# Altium PCB 400861.PcbDoc (part 3 of 7)
Units mm, origin at the board's own origin, x right, y up, seen from the top; angles counter-clockwise.
Board outline 145 x 63.5 mm, 8 copper layers (Top Side, Mid-Layer 1, Mid-Layer 2, Mid-Layer 3, Mid-Layer 4, Mid-Layer 5, Mid-Layer 6, Bottom Side), stack 1.529 mm thick; 287 components, 241 nets, 1164 pads, 3527 vias.
Unrouted connection lines stored in the file: 1.
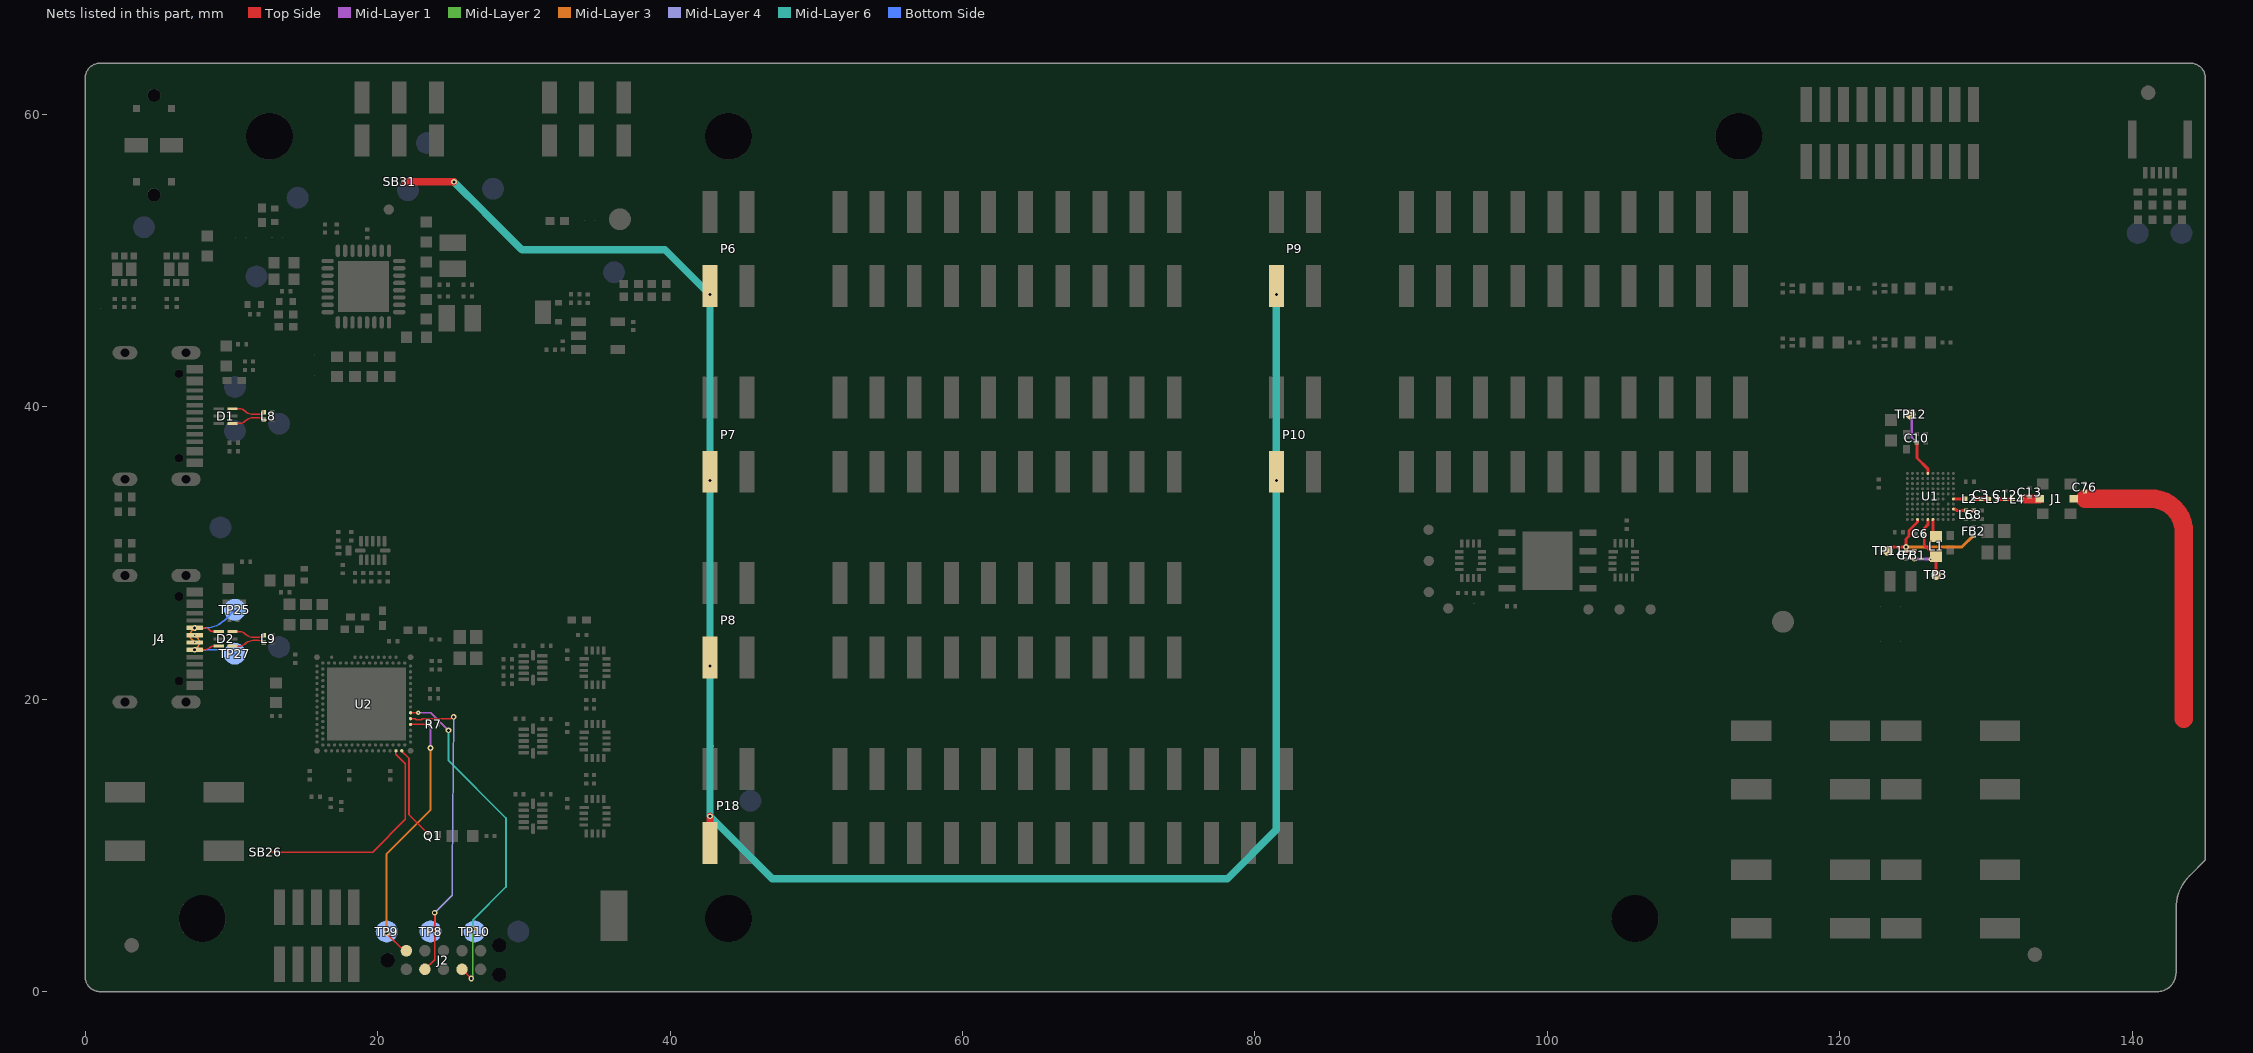
[diagram p8: the nets of this part, all layers, seen from the top]

## Part data (continued)
Q1 Q4 Q5 Q6 Q7 Q9: "N-Channel MOSFET, 20V, 1A, 470mOhm, 400mW, -55°C ~ 150°C", Manufacturer="Rohm Semiconductor", Part number IPS=00000009976, Part number NEMS=101300132, Part number Norautron=26320026, Supplier Part Number 1=RV2C010UNT2LCT-ND, Artikkelnr Noca=35010020, Author=rsk, Component Class=Semiconductors, Component Status=Active, ComponentLink1Description=Datasheet, ComponentLink1URL=N.A., ComponentLink2Description="Supplier link", ComponentLink2URL=N.A., Footprint Doc=DFN-3, HelpURL=http://rohmfs.rohm.com/en/products/databook/datasheet/discrete/transistor/mosfet/rv2c010unt2l-e.pdf, LatestRevisionDate=2024-09-18, Manufacturer Part Number=RV2C010UNT2L, Note=N.A., Pad Count=3, Part Number=RV2C010UNT2L, PartId=101300132, Published=2016-08-09, Supplier 1=Digi-Key, Supplier 2=Mouser, Supplier Part Number 2=755-RV2C010UNT2L
Q2 Q3: "Dual P-Channel MOFET, 3.8A, 90mOhm max, 1.4W", Manufacturer="Micro Commercial Components", Part number IPS=N.A., Part number NEMS=101300199, Supplier Part Number 1=MCM2301-TPMSCT-ND, Artikkelnr Noca=N.A., Author=rubr, Component Class=Semiconductors, Component Status=Active, ComponentLink1Description=Datasheet, ComponentLink1URL=https://www.mccsemi.com/pdf/Products/MCM2301(DFN2020-6L).pdf, ComponentLink2Description="Supplier link", ComponentLink2URL=https://www.digikey.com/en/products/detail/micro-commercial-co/MCM2301-TP/9655971, Footprint Doc=VDFN-6, HelpURL=https://www.mccsemi.com/product-detail/MCM2301, LatestRevisionDate=2022-12-27, Manufacturer Part Number=MCM2301-TP, Note=N.A., Pad Count=6, Part Number=MCM2301-TP, Part number Norautron=N.A., PartId=101300199, Published=2022-12-27, Supplier 1=Digi-Key, Supplier 2=Mouser, Supplier Part Number 2=833-MCM2301-TP
Q8: library part PBSS4330PA,115, "30V, 3A, 2.1W, G=270, NPN Transistor", Manufacturer=Nexperia, Part number IPS=N.A., Part number NEMS=101300184, Supplier Part Number 1=1727-5112-1-ND‎, Artikkelnr Noca=N.A., Author=rubr, Component Class=Semiconductors, Component Status=Active, ComponentLink1Description=Datasheet, ComponentLink1URL=https://assets.nexperia.com/documents/data-sheet/PBSS4330PA.pdf, ComponentLink2Description="Supplier link", ComponentLink2URL=https://www.digikey.com/en/products/detail/nexperia-usa-inc/PBSS4330PA-115/2296330, Footprint Doc="HUSON-3 (2x2)", HelpURL=https://www.nexperia.com/products/bipolar-transistors/general-purpose-and-low-vcesat-bipolar-transistors/single-bipolar-transistors/single-bipolar-transistors-100-v/PBSS4330PA.html, LatestRevisionDate=2021-06-03, Manufacturer Part Number=PBSS4330PA,115, Note=N.A., Pad Count=3, Part Number=PBSS4330PA,115, Part number Norautron=N.A., PartId=101300184, Published=2021-06-03, Supplier 1=Digi-Key, Supplier 2=N.A., Supplier Part Number 2=N.A.
R1 R11: library part R0603-2R2, "RES 2.2 OHM 1% 1/10W 0603", Manufacturer=N.A., Part number NEMS=100100736, Artikkelnr Noca=N.A., Author=getr, Component Class=Resistors, Component Status=Active, ComponentLink1Description=Datasheet, ComponentLink1URL=N.A., ComponentLink2Description="Supplier link", ComponentLink2URL=N.A., Footprint Doc=0603, HelpURL=N.A., LatestRevisionDate=2025-05-14, Manufacturer Part Number=N.A., Note="Chip Res 1%", Pad Count=2, Part Number=R0603-2R2, Part number IPS=N.A., Part number Norautron=N.A., PartId=100100736, Published=2025-05-14, Supplier 1=N.A., Supplier 2=N.A., Supplier Part Number 1=N.A., Supplier Part Number 2=N.A.
R2: library part R0201-200, "Resistor, ±1%, 0.05W", Manufacturer=N.A., Part number NEMS=100100611, Artikkelnr Noca=N.A., Author=getr, Component Class=Resistors, Component Status=Active, ComponentLink1Description=Datasheet, ComponentLink1URL=N.A., ComponentLink2Description="Supplier link", ComponentLink2URL=N.A., Footprint Doc=0201, HelpURL=N.A., LatestRevisionDate=2021-04-08, Manufacturer Part Number=N.A., Note="Chip Res 1%", Pad Count=2, Part Number=R0201-200, Part number IPS=N.A., Part number Norautron=N.A., PartId=100100611, Published=2021-04-08, Supplier 1=N.A., Supplier 2=N.A., Supplier Part Number 1=N.A., Supplier Part Number 2=N.A.
R3 R4: library part R0402-N.C., "Not mounted", Manufacturer=N.A., Part number NEMS=100100281, Artikkelnr Noca=N.A., Assembly="Not mounted", Author=rsk, Component Class=Resistors, Component Status=Active, ComponentLink1Description=Datasheet, ComponentLink1URL=N.A., ComponentLink2Description="Supplier link", ComponentLink2URL=N.A., Footprint Doc=0402, HelpURL=N.A., LatestRevisionDate=2009-05-08, Manufacturer Part Number=N.A., Note="Chip Res", Pad Count=2, Part Number=R0402-N.C., Part number IPS=N.A., Part number Norautron=N.A., PartId=100100281, Published=2009-05-08, Supplier 1=N.A., Supplier 2=N.A., Supplier Part Number 1=N.A., Supplier Part Number 2=N.A.
R5: library part R0201-560, "Resistor, ±1%, 0.05W", Manufacturer=N.A., Part number NEMS=100100038, Artikkelnr Noca=N.A., Author=rsk, Component Class=Resistors, Component Status=Active, ComponentLink1Description=Datasheet, ComponentLink1URL=N.A., ComponentLink2Description="Supplier link", ComponentLink2URL=N.A., Footprint Doc=0201, HelpURL=N.A., LatestRevisionDate=2014-11-13, Manufacturer Part Number=N.A., Note="Chip Res 1%", Pad Count=2, Part Number=R0201-560, Part number IPS=N.A., Part number Norautron=N.A., PartId=100100038, Published=2014-11-13, Supplier 1=N.A., Supplier 2=N.A., Supplier Part Number 1=N.A., Supplier Part Number 2=N.A.
R6 R12 R13 R47 R48 R49 R50 R57: library part R0201-150, "Resistor, ±1%, 0.05W", Manufacturer=N.A., Part number IPS=00000001420, Part number NEMS=100100029, Artikkelnr Noca=N.A., Author=rsk, Component Class=Resistors, Component Status=Active, ComponentLink1Description=Datasheet, ComponentLink1URL=N.A., ComponentLink2Description="Supplier link", ComponentLink2URL=N.A., Footprint Doc=0201, HelpURL=N.A., LatestRevisionDate=2014-11-13, Manufacturer Part Number=N.A., Note="Chip Res 1%", Pad Count=2, Part Number=R0201-150, Part number Norautron=N.A., PartId=100100029, Published=2014-11-13, Supplier 1=N.A., Supplier 2=N.A., Supplier Part Number 1=N.A., Supplier Part Number 2=N.A.
R7 R9 R10 R19 R23 R35 R36 R37 R38 R39 R40 R56: library part R0201-100k, "Resistor, ±1%, 0.05W", Manufacturer=N.A., Part number IPS=00000001419, Part number NEMS=100100080, Part number Norautron=26108487, Artikkelnr Noca=N.A., Author=rsk, Component Class=Resistors, Component Status=Active, ComponentLink1Description=Datasheet, ComponentLink1URL=N.A., ComponentLink2Description="Supplier link", ComponentLink2URL=N.A., Footprint Doc=0201, HelpURL=N.A., LatestRevisionDate=2014-11-13, Manufacturer Part Number=N.A., Note="Chip Res 1%", Pad Count=2, Part Number=R0201-100k, PartId=100100080, Published=2014-11-13, Supplier 1=N.A., Supplier 2=N.A., Supplier Part Number 1=N.A., Supplier Part Number 2=N.A.
R8: library part R0201-47R, "Resistor, ±1%, 0.05W", Manufacturer=N.A., Part number IPS=00000004794, Part number NEMS=100100022, Part number Norautron=26108300, Artikkelnr Noca=N.A., Author=rsk, Component Class=Resistors, Component Status=Active, ComponentLink1Description=Datasheet, ComponentLink1URL=N.A., ComponentLink2Description="Supplier link", ComponentLink2URL=N.A., Footprint Doc=0201, HelpURL=N.A., LatestRevisionDate=2014-11-13, Manufacturer Part Number=N.A., Note="Chip Res 1%", Pad Count=2, Part Number=R0201-47R, PartId=100100022, Published=2014-11-13, Supplier 1=N.A., Supplier 2=N.A., Supplier Part Number 1=N.A., Supplier Part Number 2=N.A.
R14 R16 R33 R34 R42 R43 R44 R51: library part R0402-0R, "Resistor, ±5%, 0.063W", Manufacturer=N.A., Part number IPS=00000007128, Part number NEMS=100100109, Supplier Part Number 1=146-9661, Artikkelnr Noca=27049000, Author=rsk, Component Class=Resistors, Component Status=Active, ComponentLink1Description=Datasheet, ComponentLink1URL=N.A., ComponentLink2Description="Supplier link", ComponentLink2URL=N.A., Footprint Doc=0402, HelpURL=N.A., LatestRevisionDate=2009-11-23, Manufacturer Part Number=N.A., Note="Chip Res 5%", Pad Count=2, Part Number=R0402-0R, Part number Norautron=N.A., PartId=100100109, Published=2009-05-08, Supplier 1=Farnell, Supplier 2=N.A., Supplier Part Number 2=N.A.
R15: library part R0402-10R, "Resistor, ±1%, 0.063W", Manufacturer=N.A., Part number NEMS=100100126, Supplier Part Number 1=173-8824, Artikkelnr Noca=27049025, Author=rsk, Component Class=Resistors, Component Status=Active, ComponentLink1Description=Datasheet, ComponentLink1URL=N.A., ComponentLink2Description="Supplier link", ComponentLink2URL=N.A., Footprint Doc=0402, HelpURL=N.A., LatestRevisionDate=2009-11-23, Manufacturer Part Number=N.A., Note="Chip Res 1%", Pad Count=2, Part Number=R0402-10R, Part number IPS=N.A., Part number Norautron=N.A., PartId=100100126, Published=2009-05-08, Supplier 1=Farnell, Supplier 2=N.A., Supplier Part Number 2=N.A.
R17: library part R0201-47k, "Resistor, ±1%, 0.05W", Manufacturer=N.A., Part number IPS=00000001423, Part number NEMS=100100076, Artikkelnr Noca=N.A., Author=rsk, Component Class=Resistors, Component Status=Active, ComponentLink1Description=Datasheet, ComponentLink1URL=N.A., ComponentLink2Description="Supplier link", ComponentLink2URL=N.A., Footprint Doc=0201, HelpURL=N.A., LatestRevisionDate=2014-11-13, Manufacturer Part Number=N.A., Note="Chip Res 1%", Pad Count=2, Part Number=R0201-47k, Part number Norautron=N.A., PartId=100100076, Published=2014-11-13, Supplier 1=N.A., Supplier 2=N.A., Supplier Part Number 1=N.A., Supplier Part Number 2=N.A.
R18: library part R0201-4k7, "Resistor, ±1%, 0.05W", Manufacturer=N.A., Part number IPS=00000001706, Part number NEMS=100100061, Artikkelnr Noca=N.A., Author=rsk, Component Class=Resistors, Component Status=Active, ComponentLink1Description=Datasheet, ComponentLink1URL=N.A., ComponentLink2Description="Supplier link", ComponentLink2URL=N.A., Footprint Doc=0201, HelpURL=N.A., LatestRevisionDate=2014-11-13, Manufacturer Part Number=N.A., Note="Chip Res 1%", Pad Count=2, Part Number=R0201-4k7, Part number Norautron=N.A., PartId=100100061, Published=2014-11-13, Supplier 1=N.A., Supplier 2=N.A., Supplier Part Number 1=N.A., Supplier Part Number 2=N.A.
R20 R24 R29 R30 R31 R32 R41: library part R0201-1M0, "Resistor, ±1%, 0.05W", Manufacturer=N.A., Part number IPS=00000001418, Part number NEMS=100100093, Part number Norautron=26107108, Artikkelnr Noca=N.A., Author=rsk, Component Class=Resistors, Component Status=Active, ComponentLink1Description=Datasheet, ComponentLink1URL=N.A., ComponentLink2Description="Supplier link", ComponentLink2URL=N.A., Footprint Doc=0201, HelpURL=N.A., LatestRevisionDate=2014-11-13, Manufacturer Part Number=N.A., Note="Chip Res 1%", Pad Count=2, Part Number=R0201-1M0, PartId=100100093, Published=2014-11-13, Supplier 1=N.A., Supplier 2=N.A., Supplier Part Number 1=N.A., Supplier Part Number 2=N.A.
R21 R22 R53: library part R0201-10k, "Resistor, ±1%, 0.05W", Manufacturer=N.A., Part number IPS=00000001255, Part number NEMS=100100065, Part number Norautron=26107101, Artikkelnr Noca=N.A., Author=rsk, Component Class=Resistors, Component Status=Active, ComponentLink1Description=Datasheet, ComponentLink1URL=N.A., ComponentLink2Description="Supplier link", ComponentLink2URL=N.A., Footprint Doc=0201, HelpURL=N.A., LatestRevisionDate=2014-11-13, Manufacturer Part Number=N.A., Note="Chip Res 1%", Pad Count=2, Part Number=R0201-10k, PartId=100100065, Published=2014-11-13, Supplier 1=N.A., Supplier 2=N.A., Supplier Part Number 1=N.A., Supplier Part Number 2=N.A.
R25 R26 R27 R28: library part R0201-220, "Resistor, ±1%, 0.05W", Manufacturer=N.A., Part number IPS=00000000863, Part number NEMS=100100032, Part number Norautron=26107014, Artikkelnr Noca=N.A., Author=rsk, Component Class=Resistors, Component Status=Active, ComponentLink1Description=Datasheet, ComponentLink1URL=N.A., ComponentLink2Description="Supplier link", ComponentLink2URL=N.A., Footprint Doc=0201, HelpURL=N.A., LatestRevisionDate=2014-11-13, Manufacturer Part Number=N.A., Note="Chip Res 1%", Pad Count=2, Part Number=R0201-220, PartId=100100032, Published=2014-11-13, Supplier 1=N.A., Supplier 2=N.A., Supplier Part Number 1=N.A., Supplier Part Number 2=N.A.
R45 R46: library part R0201-5k1, "Resistor, ±1%, 0.05W", Manufacturer=N.A., Part number NEMS=100100565, Part number Norautron=26192285, Artikkelnr Noca=N.A., Author=rsk, Component Class=Resistors, Component Status=Active, ComponentLink1Description=Datasheet, ComponentLink1URL=N.A., ComponentLink2Description="Supplier link", ComponentLink2URL=N.A., Footprint Doc=0201, HelpURL=N.A., LatestRevisionDate=2016-04-20, Manufacturer Part Number=N.A., Note="Chip Res 1%", Pad Count=2, Part Number=R0201-5k1, Part number IPS=N.A., PartId=100100565, Published=2016-04-20, Supplier 1=N.A., Supplier 2=N.A., Supplier Part Number 1=N.A., Supplier Part Number 2=N.A.
R52 R54: library part R0201-0R, "Resistor, ±5%, 0.05W", Manufacturer=N.A., Part number IPS=00000003245, Part number NEMS=100100001, Artikkelnr Noca=N.A., Author=rsk, Component Class=Resistors, Component Status=Active, ComponentLink1Description=Datasheet, ComponentLink1URL=N.A., ComponentLink2Description="Supplier link", ComponentLink2URL=N.A., Footprint Doc=0201, HelpURL=N.A., LatestRevisionDate=2017-11-09, Manufacturer Part Number=N.A., Note="Chip Res 5%", Pad Count=2, Part Number=R0201-0R, Part number Norautron=N.A., PartId=100100001, Published=2014-11-13, Supplier 1=N.A., Supplier 2=N.A., Supplier Part Number 1=N.A., Supplier Part Number 2=N.A.
R55: library part R0201-33k, "Resistor, ±1%, 0.05W", Manufacturer=N.A., Part number IPS=00000001708, Part number NEMS=100100073, Artikkelnr Noca=N.A., Author=rsk, Component Class=Resistors, Component Status=Active, ComponentLink1Description=Datasheet, ComponentLink1URL=N.A., ComponentLink2Description="Supplier link", ComponentLink2URL=N.A., Footprint Doc=0201, HelpURL=N.A., LatestRevisionDate=2014-11-13, Manufacturer Part Number=N.A., Note="Chip Res 1%", Pad Count=2, Part Number=R0201-33k, Part number Norautron=N.A., PartId=100100073, Published=2014-11-13, Supplier 1=N.A., Supplier 2=N.A., Supplier Part Number 1=N.A., Supplier Part Number 2=N.A.
SB1 SB2 SB5 SB23 SB26 SB28 SB29: library part "Solderbridge Shorted", "Shorted Solderbridge", Manufacturer=N.A., Part number NEMS=100500459, Artikkelnr Noca=N.A., Author=rsk, Component Class=Connectors, Component Status=Active, ComponentLink1Description=Datasheet, ComponentLink1URL=N.A., ComponentLink2Description="Supplier link", ComponentLink2URL=N.A., Footprint Doc=Solderbridge_Shorted, HelpURL=N.A., LatestRevisionDate=2012-08-07, Manufacturer Part Number=N.A., Note=N.A., Pad Count=2, Part Number="Solderbridge Shorted", Part number IPS=N.A., Part number Norautron=N.A., PartId=100500459, Published=2012-08-07, Supplier 1=N.A., Supplier 2=N.A., Supplier Part Number 1=N.A., Supplier Part Number 2=N.A., System=Connector
SB3 SB4 SB17 SB19 SB20 SB21 SB22 SB24 SB25 SB27 SB30: Manufacturer=N.A., Part number NEMS=100500458, Artikkelnr Noca=N.A., Author=rsk, Component Class=Connectors, Component Status=Active, ComponentLink1Description=Datasheet, ComponentLink1URL=N.A., ComponentLink2Description="Supplier link", ComponentLink2URL=N.A., Footprint Doc=Solderbridge, HelpURL=N.A., LatestRevisionDate=2009-12-14, Manufacturer Part Number=N.A., Note=N.A., Pad Count=2, Part Number=Solderbridge, Part number IPS=N.A., Part number Norautron=N.A., PartId=100500458, Published=2009-12-14, Supplier 1=N.A., Supplier 2=N.A., Supplier Part Number 1=N.A., Supplier Part Number 2=N.A., System=Connector
SB6 SB18 SB31: library part "Solderbridge Shorted Power", "Shorted Solderbridge Power", Manufacturer=N.A., Part number NEMS=100500460, Artikkelnr Noca=N.A., Author=rsk, Component Class=Connectors, Component Status=Active, ComponentLink1Description=Datasheet, ComponentLink1URL=N.A., ComponentLink2Description="Supplier link", ComponentLink2URL=N.A., Footprint Doc=Solderbridge_Shorted_Power, HelpURL=N.A., LatestRevisionDate=2012-08-07, Manufacturer Part Number=N.A., Note=N.A., Pad Count=2, Part Number="Solderbridge Shorted Power", Part number IPS=N.A., Part number Norautron=N.A., PartId=100500460, Published=2012-08-07, Supplier 1=N.A., Supplier 2=N.A., Supplier Part Number 1=N.A., Supplier Part Number 2=N.A., System=Connector
SW1 SW2 SW3 SW4 SW6: library part Switch-PB-6.2x6.3mm-SMD, "Tactile Switch, SPNO, SMD, 160gf, 6.2x6.3x2.5mm", Manufacturer=Dailywell, Manufacturer Part Number=TS604VM1-025BR-R, Part number IPS=00000007812, Part number NEMS="101500001, 101500133", Part number Norautron=N.A., Artikkelnr Noca=50019106, Author=rsk, Component Class=Switches, Component Status=Active, ComponentLink1Description=Datasheet, ComponentLink1URL=N.A., ComponentLink2Description="Supplier link", ComponentLink2URL=N.A., Footprint Doc=Switch-PB-6.2x6.3mm-SMD, HelpURL=\\hizz\pro\app9717\Datasheet\switches\Dailywell\TS604VM1-025BR-R.pdf, LatestRevisionDate=2016-04-21, Note=N.A., Pad Count=4, Part Number=Switch-PB-6.2x6.3mm-SMD, PartId=101500001, Published=2010-02-01, Supplier 1=Cabcon, Supplier 2=Mouser, Supplier Part Number 1=TS604VM1-025BR-R, Supplier Part Number 2=688-SKHUALE010
SW5: library part Switch-Slide-RA-J-Lead-DPDT-8.5x3.5mm_C&K, "SMD slide Switch (ON-ON)", Manufacturer=C&K, Manufacturer Part Number=JS202011JAQN, Part number IPS=00000007811, Part number NEMS=101500037, Part number Norautron=N.A., Supplier Part Number 1=CKN10722CT-ND, Artikkelnr Noca=N.A., Author=rsk, Component Class=Switches, Component Status=Active, ComponentLink1Description=Datasheet, ComponentLink1URL=N.A., ComponentLink2Description="Supplier link", ComponentLink2URL=N.A., Footprint Doc=Switch-Slide-RA-J-Lead-DPDT-8.5x3.5mm, HelpURL=http://www.ck-components.com/media/1422/js.pdf, LatestRevisionDate=2017-02-01, Note=N.A., Pad Count=6, Part Number=Switch-Slide-RA-J-Lead-DPDT-8.5x3.5mm_C&K, PartId=101500037, Published=2016-09-15, Supplier 1=Digi-Key, Supplier 2=Mouser, Supplier Part Number 2=611-JS202011JAQN
TP1 TP2 TP4 TP5 TP6 TP7 TP8 TP9 TP10 TP14 TP16 TP17 TP18 TP19 TP20 TP21 TP22 TP23 TP24 TP25 TP26 TP27 TP28: library part TP_SMD_Ø1.5MM, "1.5mm circular SMD testpad", Manufacturer="Nordic Semiconductor", Manufacturer Part Number=N.A., Part number NEMS=100500477, Artikkelnr Noca=N.A., Author=rsk, Component Class=Connectors, Component Status=Active, ComponentLink1Description=Datasheet, ComponentLink1URL=N.A., ComponentLink2Description="Supplier link", ComponentLink2URL=N.A., Footprint Doc=TP_SMD_Ø1.5mm, HelpURL=N.A., LatestRevisionDate=2021-03-05, Note=N.A., Pad Count=1, Part Number=TP_SMD_Ø1.5MM, Part number IPS=N.A., Part number Norautron=N.A., PartId=100500477, Published=2016-06-02, Supplier 1=N.A., Supplier 2=N.A., Supplier Part Number 1=N.A., Supplier Part Number 2=N.A.
TP3 TP11 TP12 TP13 TP29 TP30 TP31 TP32 TP33 TP34 TP35: library part TP_SMD_Ø0.7MM, "0.7mm circular SMD testpad", Manufacturer="Nordic Semiconductor", Manufacturer Part Number=N.A., Part number NEMS=100500474, Artikkelnr Noca=N.A., Author=rsk, Component Class=Connectors, Component Status=Active, ComponentLink1Description=Datasheet, ComponentLink1URL=N.A., ComponentLink2Description="Supplier link", ComponentLink2URL=N.A., Footprint Doc=TP_SMD_Ø0.7mm, HelpURL=N.A., LatestRevisionDate=2021-03-05, Note=N.A., Pad Count=1, Part Number=TP_SMD_Ø0.7MM, Part number IPS=N.A., Part number Norautron=N.A., PartId=100500474, Published=2017-12-14, Supplier 1=N.A., Supplier 2=N.A., Supplier Part Number 1=N.A., Supplier Part Number 2=N.A.
TP15: library part "TP - S1751-46R", "PC TEST POINT TIN SMD L", Manufacturer=Harwin, Manufacturer Part Number=S1751-46R, Part number IPS=N.A., Part number NEMS=100500525, Supplier Part Number 1=952-1478-1-ND, Artikkelnr Noca=N.A., Author=rsk, Component Class=Connectors, Component Status=Active, ComponentLink1Description=Datasheet, ComponentLink1URL=N.A., ComponentLink2Description="Supplier link", ComponentLink2URL=N.A., Footprint Doc="Harwin S1751-46R", HelpURL=http://cdn.harwin.com/pdfs/S1751.pdf, LatestRevisionDate=2015-05-29, Note=N.A., Pad Count=1, Part Number="TP - S1751-46R", Part number Norautron=N.A., PartId=100500525, Published=2015-05-29, Supplier 1=Digi-Key, Supplier 2=N.A., Supplier Part Number 2=N.A.
U1: library part nRF54LM20-PAAA, "nRF54 series BLE", Manufacturer="Nordic Semiconductor", Part number IPS=N.A., Part number NEMS=102000394, Artikkelnr Noca=N.A., Author=getr, Component Class=Nordic_Devices, Component Status=Active, ComponentLink1Description=Datasheet, ComponentLink1URL=N.A., ComponentLink2Description="Supplier link", ComponentLink2URL=N.A., Footprint Doc=FCCSP-98, HelpURL=N.A., LatestRevisionDate=2025-02-26, Manufacturer Part Number=nRF54LM20_PAAA, Note=N.A., Pad Count=98, Part Number=nRF54LM20-PAAA, Part number Norautron=N.A., PartId=102000394, Published=2025-02-26, Supplier 1="Nordic Semiconductor", Supplier 2=N.A., Supplier Part Number 1=nRF54LM20_PAAA, Supplier Part Number 2=N.A.
U2: library part nRF5340-QKAAD0, "Multi-protocol Bluetooth Low Energy, IEEE 802.15.4, ANT and 2.4GHz proprietary system-on-chip", Manufacturer="Nordic Semiconductor", Part number IPS=N.A., Part number NEMS=102000216, Part number Norautron=NOD26470035, Artikkelnr Noca=N.A., Author=rsk, Component Class=Nordic_Devices, Component Status=Active, ComponentLink1Description=Datasheet, ComponentLink1URL=N.A., ComponentLink2Description="Supplier link", ComponentLink2URL=N.A., Footprint Doc=AQFN-98, HelpURL=N.A., LatestRevisionDate=2020-12-02, Manufacturer Part Number=nRF5340-QKAAD0, Note=N.A., Pad Count=98, Part Number=nRF5340-QKAAD0, PartId=102000216, Published=2020-12-02, Supplier 1="Nordic Semiconductor", Supplier 2=N.A., Supplier Part Number 1=nRF5340-QKAAD0, Supplier Part Number 2=N.A.
U3: "Li-Ion/Li-Polymer USB-C battery charger with high efficiency buck regulators, LDOs or load switches, LED drivers, TWI and VBUSOUT", Manufacturer="Nordic Semiconductor", Part number IPS=N.A., Part number NEMS=102000291, Artikkelnr Noca=N.A., Author=eisk, Component Class=Nordic_Devices, Component Status=Active, ComponentLink1Description=Datasheet, ComponentLink1URL=N.A., ComponentLink2Description="Supplier link", ComponentLink2URL=N.A., Footprint Doc=QFN-32, HelpURL=N.A., LatestRevisionDate=2023-05-25, Manufacturer Part Number=nPM1300-QEAA, Note=N.A., Pad Count=33, Part Number=nPM1300-QEAA, Part number Norautron=N.A., PartId=102000291, Published=2022-02-17, Supplier 1="Nordic Semiconductor", Supplier 2=N.A., Supplier Part Number 1=nPM1300-QEAA, Supplier Part Number 2=N.A.
U4: library part MX25R6435FZNIL0, "Ultra low power, 64M-bit, serial multi I/O flash memory", Manufacturer=Macronix, Part number IPS=00000004370, Part number NEMS=101900438, Part number Norautron=N.A., Artikkelnr Noca=15020015, Author=rsk, Component Class=Misc_ICs, Component Status=Active, ComponentLink1Description=Datasheet, ComponentLink1URL=N.A., ComponentLink2Description="Supplier link", ComponentLink2URL=N.A., Footprint Doc=WSON-8, HelpURL=https://www.macronix.com/Lists/Datasheet/Attachments/7913/MX25R6435F,%20Wide%20Range,%2064Mb,%20v1.5.pdf, LatestRevisionDate=2021-02-26, Manufacturer Part Number=MX25R6435FZNIL0, Note=N.A., Pad Count=8, Part Number=MX25R6435FZNIL0, PartId=101900438, Published=2016-06-29, Supplier 1=Future, Supplier 2=Arrow, Supplier Part Number 1=MX25R6435FZNIL0, Supplier Part Number 2=MX25R6435FZNIL0
U5 U6 U7: "Low-Capacitance, 1:1 (SPST) 4-Channel, analog switch", Manufacturer="Texas Instruments", Manufacturer Part Number=TMUX1511RSVR, Part number IPS=N.A., Part number NEMS=101900847, Supplier Part Number 1=296-53443-2-ND, Artikkelnr Noca=N.A., Author=stl1, Component Class=Misc_ICs, Component Status=Active, ComponentLink1Description=Datasheet, ComponentLink1URL=https://www.ti.com/lit/ds/symlink/tmux1511.pdf?ts=1730882090102&ref_url=https%253A%252F%252Fwww.mouser.dk%252F, ComponentLink2Description="Supplier link", ComponentLink2URL=N.A., Footprint Doc=UFQFN-16, HelpURL=https://www.ti.com/lit/ds/symlink/tmux1511.pdf?ts=1730882090102&ref_url=https%253A%252F%252Fwww.mouser.dk%252F, LatestRevisionDate=2024-12-05, Note=N.A., Pad Count=16, Part Number=TMUX1511, Part number Norautron=N.A., PartId=101900847, Published=2024-12-05, Supplier 1=Digi-Key, Supplier 2=Mouser, Supplier Part Number 2=595-TMUX1511RSVR
U8 U12 U13 U14: library part TXB0104RUTR, "4-Bit Bidirectional Level-Shifter/Voltage Translator with Automatic Direction Sensing", Manufacturer="Texas Instruments", Part number IPS=N.A., Part number NEMS=101900856, Supplier Part Number 1=296-25888-2-ND, Artikkelnr Noca=N.A., Author=stl1, Component Class=Misc_ICs, Component Status=Active, ComponentLink1Description=Datasheet, ComponentLink1URL=N.A., ComponentLink2Description="Supplier link", ComponentLink2URL=N.A., Footprint Doc=12-UFQFN, HelpURL=https://www.ti.com/lit/ds/symlink/txb0104.pdf?ts=1738584719537&ref_url=https%253A%252F%252Fwww.mouser.com%252F, LatestRevisionDate=2025-02-04, Manufacturer Part Number=TXB0104RUTR, Note="Translator, Bidirectional", Pad Count=12, Part Number=TXB0104RUTR, Part number Norautron=N.A., PartId=101900856, Published=2025-02-04, Supplier 1=Digi-Key, Supplier 2=Mouser, Supplier Part Number 2=595-TXB0104RUTR
U9: library part TLV271CW5-7, "Dual rail to rail CMOS Amplifier", Manufacturer="Diodes Incorporated", Part number IPS=N.A., Part number NEMS=101900398, Supplier Part Number 1=TLV271CW5-7DICT-ND, Artikkelnr Noca=N.A., Author=rsk, Component Class=Misc_ICs, Component Status=Active, ComponentLink1Description=Datasheet, ComponentLink1URL=N.A., ComponentLink2Description="Supplier link", ComponentLink2URL=N.A., Footprint Doc=SOT-25, HelpURL=http://www.diodes.com/_files/datasheets/TLV27x.pdf, LatestRevisionDate=2016-04-05, Manufacturer Part Number=TLV271CW5-7, Note=N.A., Pad Count=5, Part Number=TLV271CW5-7, Part number Norautron=N.A., PartId=101900398, Published=2016-04-05, Supplier 1=Digi-Key, Supplier 2=N.A., Supplier Part Number 2=N.A.
U15 U16: "Low-Capacitance, 2:1 (SPDT) 4-Channel, analog switch", Manufacturer="Texas Instruments", Manufacturer Part Number=TMUX1574RSVR, Part number IPS=N.A., Part number NEMS=101900850, Supplier Part Number 1=296-53445-2-ND, Artikkelnr Noca=N.A., Author=stl1, Component Class=Misc_ICs, Component Status=Active, ComponentLink1Description=Datasheet, ComponentLink1URL=https://www.ti.com/lit/ds/symlink/tmux1574.pdf?ts=1730869182960, ComponentLink2Description="Supplier link", ComponentLink2URL=N.A., Footprint Doc=UFQFN-16, HelpURL=https://www.ti.com/lit/ds/symlink/tmux1574.pdf?ts=1730869182960, LatestRevisionDate=2024-11-20, Note=N.A., Pad Count=16, Part Number=TMUX1574, Part number Norautron=N.A., PartId=101900850, Published=2024-11-20, Supplier 1=Digi-Key, Supplier 2=Mouser, Supplier Part Number 2=595-TMUX1574RSVR
X1: library part XTAL_SMD2016_32MHz_8pF_Kyocera, "XTAL SMD 2016, 32MHz, Cl=8pF, Tot: ±40ppm", Manufacturer=Kyocera, Manufacturer Part Number=CX2016DB32000D0WZRC1, Part number IPS=00000007827, Part number NEMS=101600039, Part number Norautron=26511136, Supplier Part Number 1=1253-1586-1-ND, Artikkelnr Noca=22010022, Author=rsk, Component Class=Oscillators, Component Status=Active, ComponentLink1Description=Datasheet, ComponentLink1URL=N.A., ComponentLink2Description="Supplier link", ComponentLink2URL=N.A., Footprint Doc=XTAL_2016, HelpURL=http://media.digikey.com/pdf/Data%20Sheets/AVX%20PDFs/CX2016DB32000D0WZRC1_Spec.pdf, LatestRevisionDate=2016-06-02, Note="XTAL SMD 32.000MHz", Pad Count=4, Part Number=XTAL_SMD2016_32MHz_8pF_Kyocera, PartId=101600039, Published=2015-10-15, Supplier 1=Digi-Key, Supplier 2=N.A., Supplier Part Number 2=N.A.
X2: library part XTAL_SMD2012_32.768kHz_9pF_TXC, "XTAL SMD 2012, 32.768kHz, 9pF, ±20ppm", Manufacturer="TXC Corporation", Manufacturer Part Number=9HT11-32.768KDZC-T, Part number IPS=N.A., Part number NEMS=101600107, Supplier Part Number 1=887-1426-2-ND, Artikkelnr Noca=N.A., Author=eisk, Component Class=Oscillators, Component Status=Active, ComponentLink1Description=Datasheet, ComponentLink1URL=http://www.txccrystal.com/images/pdf/9ht11.pdf, ComponentLink2Description="Supplier link", ComponentLink2URL=https://www.digikey.com/en/products/detail/9HT11-32.768KDZC-T/887-1426-1-ND/2403277, Footprint Doc=XTAL_2012, HelpURL=http://www.txccrystal.com/images/pdf/9ht11.pdf, LatestRevisionDate=2023-03-14, Note="XTAL SMD 32.768kHz", Pad Count=2, Part Number=XTAL_SMD2012_32.768kHz_9pF_TXC, Part number Norautron=N.A., PartId=101600107, Published=2014-03-28, Supplier 1=Digi-Key, Supplier 2=Mouser, Supplier Part Number 2=717-9HT11-32.7KDZC-T
X3: library part XTAL_SMD2016_32MHz_8pF_Golledge, "XTAL SMD 2016, 32MHz, Cl=8pF, Tol: ±10ppm, Stab: ±15ppm", Manufacturer=Golledge, Manufacturer Part Number=MP06003, Part number IPS=00000001431, Part number NEMS=101600041, Part number Norautron=N.A., Artikkelnr Noca=22010050, Author=rsk, Component Class=Oscillators, Component Status=Active, ComponentLink1Description=Datasheet, ComponentLink1URL=N.A., ComponentLink2Description="Supplier link", ComponentLink2URL=N.A., Footprint Doc=XTAL_2016, HelpURL=\\hizz\pro\app9717\Datasheet\crystals\Golledge\mp06003.pdf, LatestRevisionDate=2016-11-02, Note="XTAL SMD 32.000MHz", Pad Count=4, Part Number=XTAL_SMD2016_32MHz_8pF_Golledge, PartId=101600041, Published=2016-11-02, Supplier 1="Link Nordic", Supplier 2=N.A., Supplier Part Number 1=N.A., Supplier Part Number 2=N.A.

## Via types
v1: diameter 0.4, hole 0.2, Top Side to Bottom Side, tented both sides, 2409 vias
v2: diameter 0.3, hole 0.1, Top Side to Mid-Layer 1, tented both sides, 307 vias
v3: diameter 0.3, hole 0.1, Mid-Layer 1 to Mid-Layer 2, tented both sides, 204 vias
v4: diameter 0.4, hole 0.2, Mid-Layer 3 to Mid-Layer 4, tented both sides, 199 vias
v5: diameter 0.3, hole 0.1, Mid-Layer 2 to Mid-Layer 3, tented both sides, 98 vias
v6: diameter 0.3, hole 0.1, Mid-Layer 4 to Mid-Layer 5, tented both sides, 82 vias
v7: diameter 0.3, hole 0.1, Mid-Layer 2 to Mid-Layer 3, 70 vias
v8: diameter 0.2, hole 0.1, Top Side to Mid-Layer 1, tented both sides, 64 vias
v9: diameter 0.2, hole 0.1, Mid-Layer 1 to Mid-Layer 2, tented both sides, 41 vias
v10: diameter 0.2, hole 0.1, Mid-Layer 2 to Mid-Layer 3, 17 vias
v11: diameter 0.2, hole 0.1, Mid-Layer 2 to Mid-Layer 3, tented both sides, 14 vias
v12: diameter 0.3, hole 0.1, Mid-Layer 5 to Mid-Layer 6, tented both sides, 12 vias
v13: diameter 0.2, hole 0.1, Mid-Layer 1 to Mid-Layer 2, 4 vias
v14: diameter 0.3, hole 0.1, Top Side to Mid-Layer 1, tented top, 3 vias
v15: diameter 0.2, hole 0.1, Top Side to Mid-Layer 1, tented top, 2 vias
v16: diameter 0.225, hole 0.1, Mid-Layer 1 to Mid-Layer 2, tented both sides, 1 vias

## Nets (pads, with @x,y where several pads share a name; then routed paths per layer and width w, separated by ;. In a path a pad name is that pad's centre, name@x,y a point inside that pad or via, vN(x,y) a via of type N, cw(c..) or ccw(c..) an arc to the next point about the centre after c; other vN are vias at no path point)
5V0:CONN: P6.1 P7.1 P8.1 P9.1 P10.1 P18.1 SB31.1 | length 140.1
  Top Side w0.5: SB31.1@21.851,55.395 25.212,55.395 v1(25.216,55.39) ; P18.1@42.73,10.16 v1(42.73,11.998)
  Mid-Layer 6 w0.5: v1@25.212,55.394 27.36,53.257 ; 27.367,53.25 29.865,50.752 39.647,50.752 v1(42.73,47.67) v1(42.73,34.97) v1(42.73,22.27) 42.73,16.834 ; 42.763,16.8 42.73,16.834 ; v1(81.465,47.67) v1(81.465,34.97) 81.465,11.078 78.121,7.734 46.995,7.734 v1(42.73,11.998) 42.73,16.834
ANT: C76.2 J1.3 | length 21.6
  Top Side w0.4: J1.3@135.997,33.712 136.783,33.712
  Top Side w1.27: 136.783,33.712 141.401,33.712 ; 141.283,33.716 cw(c141.283,31.471) 143.527,31.471 ; 143.524,18.662 143.524,31.353
ant:1: L2.1 U1.E1 | length 0.8
  Top Side w0.102: L2.1@128.586,33.7 L2.1@128.587,33.702
  Top Side w0.2: U1.E1@127.77,33.7 L2.1@128.586,33.7
ant:2: C3.2 L2.2 L3.1 | length 1.1
  Top Side w0.102: L3.1@130.219,33.702 L3.1@130.22,33.7
  Top Side w0.3: L2.2@129.157,33.702 L3.1@130.219,33.702
ant:3: C12.1 L3.2 L4.1 | length 1.1
  Top Side w0.3: L3.2@130.79,33.7 L4.1@131.842,33.7
ant:4: C13.2 J1.1 L4.2 | length 1
  Top Side w0.639: 132.65,33.694 J1.1@133.659,33.694
D1_N: D1.3 L8.1 | length 2.3
  Top Side w0.099: D1.3@10.065,39.87 10.566,39.87 cw(c10.566,39.4) 10.899,39.733 ccw(c11.501,40.334) 11.501,39.483 11.869,39.483 ccw(c11.869,39.951) L8.1@12.2,39.62
D1_P: D1.1 L8.2 | length 2.3
  Top Side w0.099: D1.1@10.065,38.87 10.566,38.87 ccw(c10.566,39.341) 10.899,39.008 cw(c11.501,38.407) 11.501,39.257 11.87,39.257 cw(c11.87,38.79) L8.2@12.2,39.12
D2_N: D2.3 L9.1 | length 2.3
  Top Side w0.099: D2.3@10.065,24.634 10.566,24.634 cw(c10.566,24.164) 10.899,24.496 ccw(c11.501,25.098) 11.501,24.247 11.869,24.247 ccw(c11.869,24.715) L9.1@12.2,24.384
D2_P: D2.1 L9.2 | length 2.3
  Top Side w0.099: D2.1@10.065,23.634 10.566,23.634 ccw(c10.566,24.104) 10.899,23.772 cw(c11.501,23.17) 11.501,24.021 11.87,24.021 cw(c11.87,23.554) L9.2@12.2,23.884
DBGR_BUTTON: SB26.2 U2.AL27 | length 15.1
  Top Side w0.1: SB26.2@12.7,9.55 19.65,9.55 21.9,11.8 21.9,15.6 21.25,16.25 U2.AL27@21.25,16.475
DBGR_LED: Q1.1 U2.AL29 | length 6.3
  Top Side w0.125: U2.AL29@21.65,16.451 22.144,15.957 22.144,12.107 23.375,10.875 Q1.1@23.422,10.875
DBGR_N: D2.4 J4.A7 J4.B7 TP25.1 | length 6.1
  Top Side w0.099: v1(7.485,24.884) 8.127,24.884 cw(c8.127,24.318) 8.527,24.718 ccw(c8.73,24.921) 8.73,24.634 D2.4@9.135,24.634
  Mid-Layer 3 w0.09: v5(7.485,23.884) 7.271,24.099 cw(c7.544,24.372) 7.157,24.372 cw(c7.604,24.372) 7.288,24.687 v1(7.485,24.884)
  Bottom Side w0.099: v1(7.485,24.884) 8.269,24.884 ccw(c8.269,26.661) 9.525,25.405 TP25.1@10.236,26.115
  other v2: 7.485,23.884
  other v3: 7.485,23.884
DBGR_P: D2.6 J4.A6 J4.B6 TP27.1 | length 5.8
  Top Side w0.099: v1(7.485,23.384) 8.174,23.385 ccw(c8.174,23.873) 8.519,23.528 cw(c8.776,23.271) 8.776,23.634 D2.6@9.135,23.634
  Mid-Layer 3 w0.09: v1@7.486,23.385 7.683,23.582 ccw(c7.367,23.897) 7.813,23.897 ccw(c7.427,23.897) 7.7,24.171 v5(7.486,24.385)
  Bottom Side w0.099: v1(7.485,23.384) 9.576,23.385 cw(c9.576,22.466) TP27.1@10.226,23.115
  other v2: 7.486,24.385
  other v3: 7.486,24.385
DBGR_RESET: J2.10 R7.1 TP9.1 U2.AC31 | length 18.7
  Top Side w0.1: U2.AC31@22.25,18.275 v2(23.565,18.275)
  Top Side w0.125: v1(20.6,4) 21.8,2.8 J2.10@21.96,2.8
  Mid-Layer 1 w0.125: v2(23.565,18.275) 23.609,18.232 v1(23.609,16.673)
  Mid-Layer 3 w0.125: v1(20.6,4) 20.6,9.4 23.609,12.409 v1(23.609,16.673)
DBGR_SWDCLK: J2.4 TP10.1 U2.W31 | length 23.6
  Top Side w0.1: U2.W31@22.25,19.075 v2@22.772,19.075
  Top Side w0.125: J2.4@25.77,1.53 v1(26.4,0.9)
  Mid-Layer 1 w0.1: v2(22.773,19.076) 23.637,19.076 v1(24.837,17.876)
  Mid-Layer 2 w0.125: v1(26.4,0.9) 26.5,1 v1(26.5,4.3)
  Mid-Layer 6 w0.125: v1(24.837,17.876) 24.837,15.814 28.776,11.875 28.776,7.165 26.5,4.889 v1(26.5,4.3)
DBGR_SWDIO: J2.2 TP8.1 U2.AA31 | length 22.5
  Top Side w0.1: U2.AA31@22.25,18.675 22.559,18.675 22.634,18.6 22.966,18.6 23.041,18.675 24.982,18.675 ccw(c24.982,18.775) 25.037,18.692 v1(25.2,18.8) ; J2.2@23.23,1.53 23.9,2.2 v1(23.9,5.4)
  Mid-Layer 4 w0.1: v1(23.9,5.4) 25.112,6.612 25.112,8.333 ; 25.112,8.335 v1(25.2,18.8)
  Bottom Side w0.1: TP8.1@23.616,4.115 ccw(c22.931,4.8) 23.9,4.8 v1(23.9,5.4)
DCC: L1.1 U1.A5 | length 1.3
  Top Side w0.203: U1.A5@126.37,32.3 126.37,31.339 L1.1@126.586,31.123
DECA: C7.2 FB1.2 FB2.2 TP11.1 U1.A8 | length 9.3
  Top Side w0.203: TP11.1@123.305,30.145 123.583,30.423 v1(124.529,30.423) ; FB1.2@125.087,30.149 C7.2@124.529,30.149 124.523,30.155 124.523,30.964 124.732,31.173 124.732,31.541 125.32,32.129 U1.A8@125.32,32.3
  Mid-Layer 3 w0.203: v1(124.529,30.423) 128.369,30.423 v3(129.159,31.213)
  other v2: 129.159,31.213
  other v5: 129.159,31.213
DECD: C6.2 FB1.1 L1.2 TP3.1 U1.A6 | length 5.4
  Top Side w0.203: U1.A6@126.02,32.3 126.02,31.929 125.779,31.688 C6.2@125.779,31.312 125.779,30.558 126.58,29.756 TP3.1@126.58,28.507
  Mid-Layer 1 w0.203: v14(125.088,29.585) v14(126.231,29.585)
DECRF: C8.1 L5.2 U1.C1 | length 1.4
  Top Side w0.203: U1.C1@127.77,33 127.906,33 128.011,32.896 L5.2@128.636,32.896 C8.1@129.159,32.896
DECUSB: C10.2 TP12.1 U1.K6 | length 4.5
  Top Side w0.203: v2(125.274,37.566) 125.274,36.509 126.02,35.763 U1.K6@126.02,35.45
  Mid-Layer 1 w0.152: v2(124.848,39.48) 124.918,39.409 124.918,37.922 v2(125.274,37.566)